# Altium PCB CME_M5_DevBrd_V1.PcbDoc (part 1 of 2)
Units mil, origin at the board's own origin, x right, y up, seen from the top; angles counter-clockwise.
Board outline 3755 x 3680 mil, 2 copper layers (Top Layer, Bottom Layer); 105 components, 0 nets, 635 pads, 230 vias.
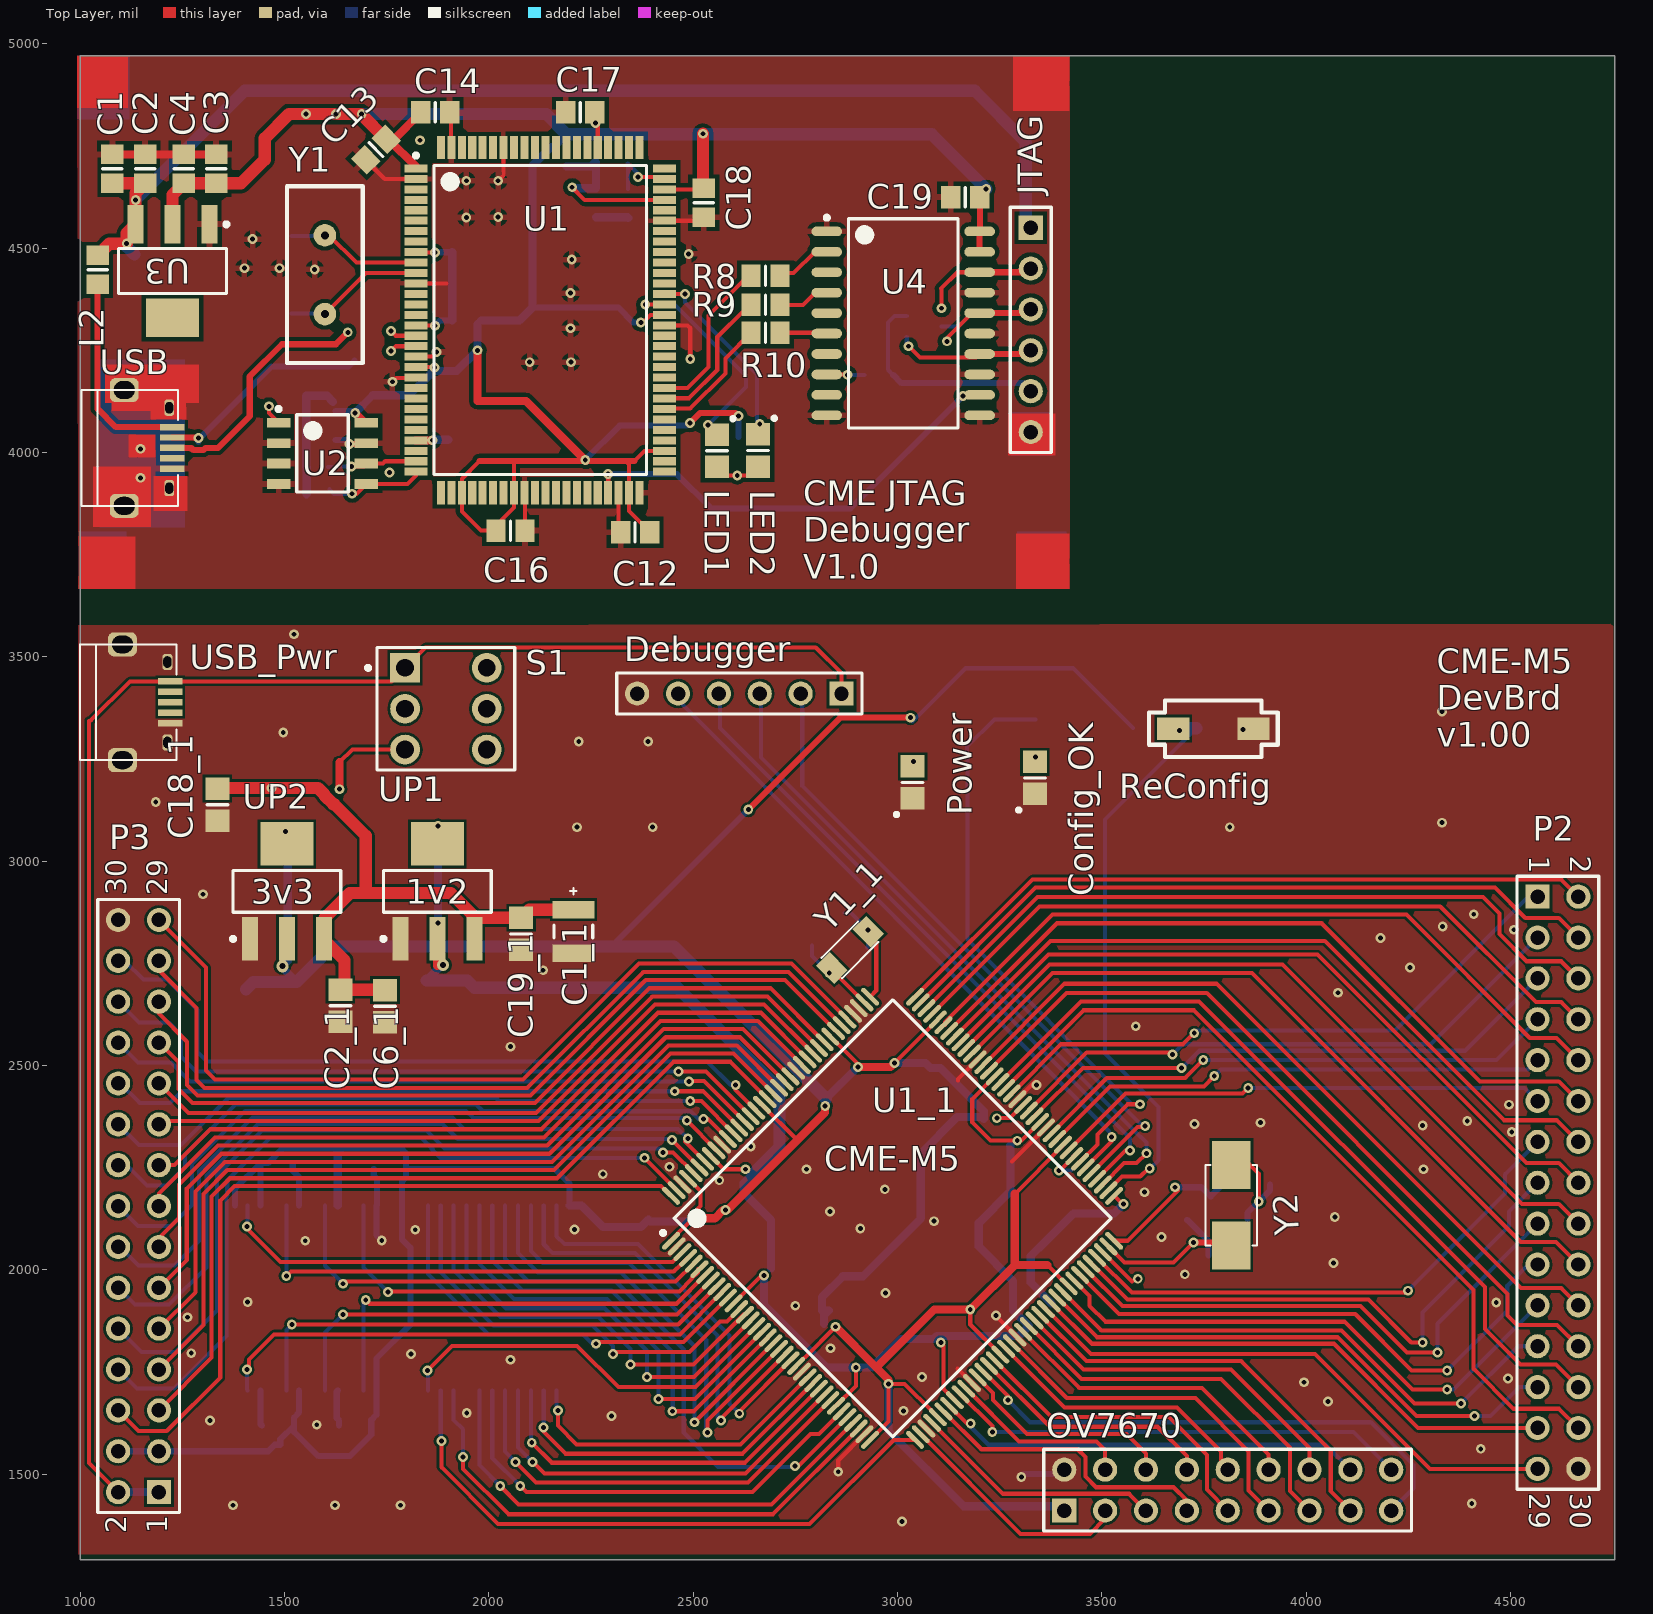
[diagram p0: Top Layer view]
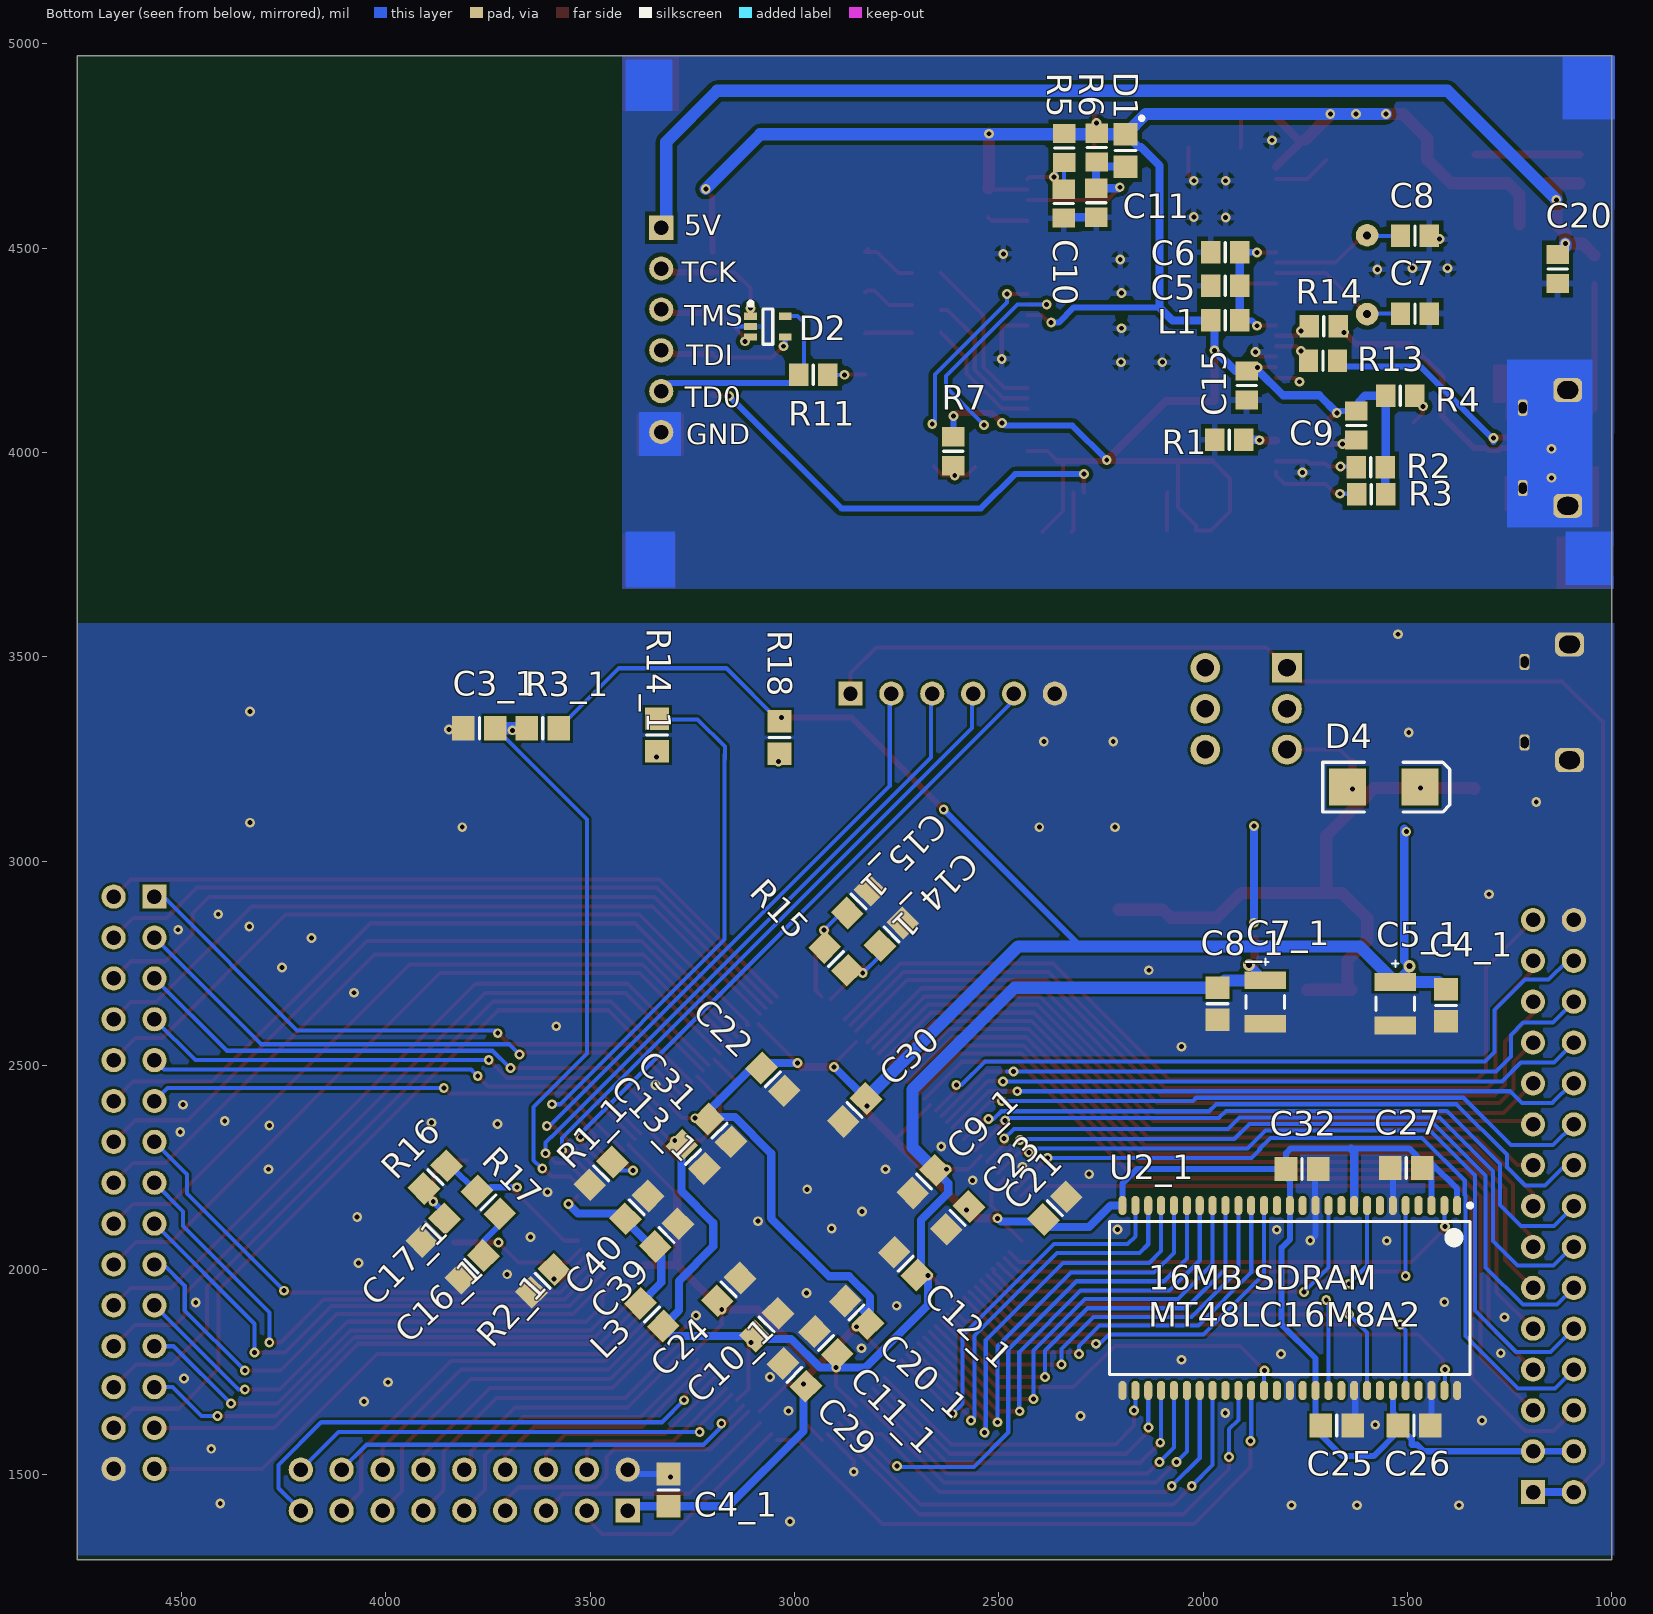
[diagram p1: Bottom Layer view, seen from below]

## Layer stack, top to bottom
Top Solder: solder mask 0.4, Solder Resist, Dk 3.5
Top Layer: signal copper 1.4
Dielectric 1: dielectric 12.6, FR-4, Dk 4.8
Bottom Layer: signal copper 1.4
Bottom Solder: solder mask 0.4, Solder Resist, Dk 3.5

## Board outline
1000,1290 4755,1290 4755,4970 1000,4970

## Design rules (kind name [scope] priority, off if disabled: settings)
Clearance [All] p1: gap=10
PolygonConnect [All] p1: connectstyle=Relief reliefconductorwidth=10 reliefentries=4 polygonreliefangle="90 Angle" airgapwidth=10
RoutingVias [All] p1: holewidth=28 width=50 viastyle="Through Hole" minholewidth=28 minwidth=50 maxholewidth=28 maxwidth=50
SolderMaskExpansion [All] p1: expansion=4
Width [All] p1: maxlimit=10 minlimit=10 preferedwidth=10
30 further rules are at their usual default settings.

## Components (designator, comment, footprint, x,y, rotation, side; value= is the part's Value field where it differs from the comment)
C1 "Cap" 6-0805_N 1079,4693.83 r270 top
C1_1 "Cap Pol3" TanCap-1210 2207,2828 r270 top (schematic designator C1)
C2 "Cap" 6-0805_N 1159,4693.83 r270 top
C2_1 "Cap" 6-0805_M 1637,2646 r90 top (schematic designator C2)
C3 "Cap" 6-0805_N 1333,4693.83 r270 top
C3_1 "Cap" 6-0805_M 3771,3325.26 r180 bottom (schematic designator C3)
C4 "Cap" 6-0805_N 1254,4693.83 r270 top
C4_1 "Cap" 6-0805_M 1406,2647 r90 bottom (schematic designator C4)
C4_1 "Cap" 6-0805_M 3308,1461 r270 bottom (schematic designator C4)
C5 "Cap" 6-0805_N 1946,4407.83 r180 bottom
C5_1 "Cap Pol3" TanCap-1210 1530,2651 r270 bottom (schematic designator C5)
C6 "Cap" 6-0805_N 1946,4489.83 r180 bottom
C6_1 "Cap" 6-0805_M 1746,2645 r90 top (schematic designator C6)
C7 "Cap" 6-0805_N 1482,4339.83 r0 bottom
C7_1 "Cap Pol3" TanCap-1210 1848,2655 r270 bottom (schematic designator C7)
C8 "Cap" 6-0805_N 1482,4529.83 r0 bottom
C8_1 "Cap" 6-0805_M 1965,2651 r90 bottom (schematic designator C8)
C9 "Cap" 6-0805_N 1625,4065.83 r270 bottom
C9_1 "Cap" 6-0805_M 2683,2216 r135 bottom (schematic designator C9)
C10 "Cap" 6-0805_N 2341,4608.83 r90 bottom
C10_1 "Cap" 6-0805_M 3068,1866 r315 bottom (schematic designator C10)
C11 "Cap" 6-0805_N 2262,4610.83 r90 bottom
C11_1 "Cap" 6-0805_M 2923,1821 r225 bottom (schematic designator C11)
C12 "Cap" 6-0805_N 2358,3804.83 r0 top
C12_1 "Cap" 6-0805_M 2728,2015 r225 bottom (schematic designator C12)
C13 "Cap" 6-0805_N 1724,4740.83 r45 top
C13_1 "Cap" 6-0805_M 3248,2276 r45 bottom (schematic designator C13)
C14 "Cap" 6-0805_N 1869,4831.83 r180 top
C14_1 "Cap" 6-0805_M 2763,2821 r315 bottom (schematic designator C14)
C15 "Cap" 6-0805_N 1894,4163.83 r90 bottom
C15_1 "Cap" 6-0805_M 2843,2901 r315 bottom (schematic designator C15)
C16 "Cap" 6-0805_N 2053,3808.83 r180 top
C16_1 "Cap" 6-0805_M 3789,2007 r135 bottom (schematic designator C16)
C17 "Cap" 6-0805_N 2224,4831.83 r0 top
C17_1 "Cap" 6-0805_M 3884,2097 r135 bottom (schematic designator C17)
C18 "Cap" 6-0805_N 2526,4610.83 r90 top
C18_1 "Cap" 6-0805_M 1336,3138 r90 top (schematic designator C18)
C19 "Cap" 6-0805_N 3166,4624.83 r0 top
C19_1 "Cap" 6-0805_M 2079,2822 r90 top (schematic designator C19)
C20 "Cap" 6-0805_N 1133,4448.83 r270 bottom
C20_1 "Cap" 6-0805_M 2848,1896 r225 bottom (schematic designator C20)
C21 "Cap" 6-0805_M 2363,2151.04 r315 bottom
C22 "Cap" 6-0805_M 3053,2466 r45 bottom
C23 "Cap" 6-0805_M 2601,2127 r135 bottom
C24 "Cap" 6-0805_M 3161,1952 r315 bottom
C25 "Cap" 6-0805_M 1673,1619 r0 bottom
C26 "Cap" 6-0805_M 1484,1619 r0 bottom
C27 "Cap" 6-0805_M 1503,2249 r180 bottom
C29 "Cap" 6-0805_M 3000,1743 r225 bottom
C30 "Cap" 6-0805_M 2853,2391 r135 bottom
C31 "Cap" 6-0805_M 3183,2341 r45 bottom
C32 "Cap" 6-0805_M 1758,2247 r0 bottom
C39 "Cap" 6-0805_M 3313,2085 r315 bottom
C40 "Cap" 6-0805_M 3386,2153 r315 bottom
Config_OK "LED2" 6-0805_Diode 3336,3203.63 r270 top
D1 "IN4148" 6-0805_Diode 2190,4738.83 r90 bottom
D2 "PESDXV4UG" SOT5N-65P210X110 3065,4307.83 r180 bottom
D4 "SS34" SMB 1558,3181 r180 bottom
Debugger "Debug" HDR1X6 2863,3410 r180 top (schematic designator P4)
JTAG "Header 6" HDR1X6 3326,4549.83 r270 top
L1 "Inductor" 6-0805_N 1946,4322.83 r180 bottom
L2 "Inductor" 6-0805_N 1043,4446.83 r270 top
L3 "Inductor" 6-0805_M 3349.21,1890.07 r45 bottom
LED1 "LED2" 6-0805_Diode 2558,4003.83 r90 top
LED2 "LED2" 6-0805_Diode 2659,4004.83 r90 top
OV7670 "OV7670" HDR2X9 3408,1411 r0 top
P2 "Header 15X2" HDR2X15 4566,2913 r270 top
P3 "Header 15X2" HDR2X15 1193,1456 r90 top locked
Power "LED2" 6-0805_Diode 3037,3192.63 r270 top
R1 "Res3" 6-0805_N 1936,4030.83 r180 bottom
R1_1 "Res3" 6-0805_M 3473,2236 r135 bottom (schematic designator R1)
R2 "Res3" 6-0805_N 1590,3963.83 r180 bottom
R2_1 "Res3" 6-0805_M 3616,1973 r135 bottom (schematic designator R2)
R3 "Res3" 6-0805_N 1589,3897.83 r180 bottom
R3_1 "Res3" 6-0805_M 3616,3325.26 r180 bottom (schematic designator R3)
R4 "Res3" 6-0805_N 1518,4138.83 r0 bottom
R5 "Res3" 6-0805_N 2340,4744.83 r270 bottom
R6 "Res3" 6-0805_N 2261,4745.83 r270 bottom
R7 "Res3" 6-0805_N 2611,4002.83 r90 bottom
R8 "Res3" 6-0805_N 2677,4431.83 r0 top
R9 "Res3" 6-0805_N 2677,4360.83 r0 top
R10 "Res3" 6-0805_N 2677,4292.83 r0 top
R11 "Res3" 6-0805_N 2954,4189.83 r180 bottom
R13 "Res3" 6-0805_N 1707,4224.83 r180 bottom
R14 "Res3" 6-0805_N 1705,4308.83 r180 bottom
R14_1 "Res1" 6-0805_M 3336,3308.63 r270 bottom (schematic designator R14)
R15 "Res3" 6-0805_M 2898,2761 r225 bottom
R16 "Res3" 6-0805_M 3879,2227 r315 bottom
R17 "Res3" 6-0805_M 3749,2165 r45 bottom
R18 "Res1" 6-0805_M 3037,3302.63 r270 bottom
ReConfig "S2" Switch_SMT-022S-H2.5 3773,3324 r0 top (schematic designator S2)
S1 "SW-DPDT" DPDT-6 1895,3373 r0 top
U1 "CY7C68013A-100AXC" TQFP100N-65P1600X2200X160 2125.87,4323.83 r0 top locked
U1_1 "CME-M5-QFP144" QFP144N-50P2200X2200X160 2988,2126 r45 top locked (schematic designator U1)
U2 "24LC64" SOP8N-127P600X200 1593,3997.83 r0 top
U2_1 "MT48LC16M8A2" TSOP54-80P1180X100- 1788,1931 r270 bottom locked (schematic designator U2)
U3 "LM1117-3.3" SOT223_N 1226,4443.83 r270 top
U4 "74LVC244" SOP20N-127P1030X265 3014,4315.83 r0 top
UP1 "LM1117-1.2" SOT223_M 1874,2926 r90 top
UP2 "LM1117-3.3" SOT223_M 1506,2926 r90 top
USB "Header 9" MicroUSB#1 1129.43,4023.26 r90 top
USB_Pwr "Header 5" MicroUSB#2 1125,3401 r90 top
Y1 "24MHZ" XTAL 1599,4434.83 r270 top
Y1_1 "32.768k" XTAL-3215 2884,2783 r225 top (schematic designator Y1)
Y2 "20M" XTAL-5032 3817,2158 r90 top

## Footprints (in the part's own frame and the unit in brackets; to place one, negate y for a bottom-side part, rotate by r counter-clockwise, add the part's x,y. Pads: shape width x height; smd on the part's side, far side on the other; paste and mask are expansions set on the pad)
6-0805_Diode [mm] "Chip Resistor, Body 2.0x1.2mm, IPC Low Density"
  rect 1.4x1.5 smd: 1(-1,0) 2(1,0)
  silkscreen extent 0,-1.1 2.1,0.65, body extent -1.07,-0.7 1.07,0.7, height 0.7
6-0805_M [mm] "Chip Resistor, Body 2.0x1.2mm, IPC Low Density"
  rect 1.4x1.5 smd: 1(-1,0) 2(1,0)
  silkscreen extent 0,-0.65 0,0.65, body extent -1.07,-0.7 1.07,0.7, height 0.7
6-0805_N [mm] "Chip Resistor, Body 2.0x1.2mm, IPC Medium Density"
  rect 1.2x1.4 smd: 1(-0.9,0) 2(0.9,0)
  silkscreen extent 0,-0.6 0,0.6, body extent -1.07,-0.7 1.07,0.7, height 0.7
DPDT-6 [mm] "Switch; 6 Leads"
  rect 1.85x1.85 hole 1.1: 1(-2.54,2.54)
  round 1.85 hole 1.1: 2(-2.54,0) 3(-2.54,-2.54) 4(2.54,-2.54) 5(2.54,0) 6(2.54,2.54)
  silkscreen extent -4.96,-3.81 4.28,3.81
HDR1X6 [mm] "Connector; Header; 6 Position"
  rect 1.5x1.5 hole 0.9: 1(0,0)
  round 1.5 hole 0.9: 2(2.54,0) 3(5.08,0) 4(7.62,0) 5(10.16,0) 6(12.7,0)
  silkscreen extent -1.27,-1.27 13.97,1.27
HDR2X9 [mm] "Connector; Header; 9x2 Position"
  rect 1.5x1.5 hole 0.9: 1(0,0)
  round 1.5 hole 0.9: 2(0,2.54) 3(2.54,0) 4(2.54,2.54) 5(5.08,0) 6(5.08,2.54) 7(7.62,0) 8(7.62,2.54) 9(10.16,0) 10(10.16,2.54) 11(12.7,0) 12(12.7,2.54) 13(15.24,0) 14(15.24,2.54) 15(17.78,0) 16(17.78,2.54) 17(20.32,0) 18(20.32,2.54)
  silkscreen extent -1.27,-1.27 21.59,3.81
HDR2X15 [mm] "Connector; Header; 15x2 Position"
  rect 1.5x1.5 hole 0.9: 1(0,0)
  round 1.5 hole 0.9: 2(0,2.54) 3(2.54,0) 4(2.54,2.54) 5(5.08,0) 6(5.08,2.54) 7(7.62,0) 8(7.62,2.54) 9(10.16,0) 10(10.16,2.54) 11(12.7,0) 12(12.7,2.54) 13(15.24,0) 14(15.24,2.54) 15(17.78,0) 16(17.78,2.54) 17(20.32,0) 18(20.32,2.54) 19(22.86,0) 20(22.86,2.54) 21(25.4,0) 22(25.4,2.54) 23(27.94,0) 24(27.94,2.54) 25(30.48,0) 26(30.48,2.54) 27(33.02,0) 28(33.02,2.54) 29(35.56,0) 30(35.56,2.54)
  silkscreen extent -1.27,-1.27 36.83,3.81
MicroUSB#1 [mm]
  round 0.635 on Top Overlay: 0(0.986,-3.776)
  rect 0.4x1.524 smd: 1(0.986,-2.426) 2(0.336,-2.426) 3(-0.314,-2.426) 4(-0.964,-2.426) 5(-1.614,-2.426)
  rrect50% 1.5x1.8 hole 1.1 slot 1.3 at 90 deg: 6(3.286,0.543) 7(-3.911,0.543)
  rrect50% 1x0.6 hole 0.5 slot 0.7 at 0 deg: 8(-2.812,-2.254) 9(2.188,-2.254)
  silkscreen extent -3.91,-2.81 3.29,3.19
MicroUSB#2 [mm]
  round 0.635 on Top Overlay: 0(0.986,-3.776)
  rect 0.4x1.524 smd: 1(0.986,-2.426) 2(0.336,-2.426) 3(-0.314,-2.426) 4(-0.964,-2.426) 5(-1.614,-2.426)
  rrect50% 1.5x1.8 hole 1.1 slot 1.3 at 90 deg: 5(-3.911,0.543) 5(3.286,0.543)
  rrect50% 1x0.6 hole 0.5 slot 0.7 at 0 deg: 5(-2.812,-2.254) 5(2.188,-2.254)
  silkscreen extent -3.91,-2.81 3.29,3.19
QFP144N-50P2200X2200X160 [mm] "TSQFP, 144-Leads, Body 20.00x20.00mm, Pitch 0.50mm, IPC Medium Density"
  oval 1.45x0.3 smd: 1(-10.725,8.75) 2(-10.725,8.25) 3(-10.725,7.75) 4(-10.725,7.25) 5(-10.725,6.75) 6(-10.725,6.25) 7(-10.725,5.75) 8(-10.725,5.25) 9(-10.725,4.75) 10(-10.725,4.25) 11(-10.725,3.75) 12(-10.725,3.25) 13(-10.725,2.75) 14(-10.725,2.25) 15(-10.725,1.75) 16(-10.725,1.25) 17(-10.725,0.75) 18(-10.725,0.25) 19(-10.725,-0.25) 20(-10.725,-0.75) 21(-10.725,-1.25) 22(-10.725,-1.75) 23(-10.725,-2.25) 24(-10.725,-2.75) 25(-10.725,-3.25) 26(-10.725,-3.75) 27(-10.725,-4.25) 28(-10.725,-4.75) 29(-10.725,-5.25) 30(-10.725,-5.75) 31(-10.725,-6.25) 32(-10.725,-6.75) 33(-10.725,-7.25) 34(-10.725,-7.75) 35(-10.725,-8.25) 36(-10.725,-8.75) 73(10.725,-8.75) 74(10.725,-8.25) 75(10.725,-7.75) 76(10.725,-7.25) 77(10.725,-6.75) 78(10.725,-6.25) 79(10.725,-5.75) 80(10.725,-5.25) 81(10.725,-4.75) 82(10.725,-4.25) 83(10.725,-3.75) 84(10.725,-3.25) 85(10.725,-2.75) 86(10.725,-2.25) 87(10.725,-1.75) 88(10.725,-1.25) 89(10.725,-0.75) 90(10.725,-0.25) 91(10.725,0.25) 92(10.725,0.75) 93(10.725,1.25) 94(10.725,1.75) 95(10.725,2.25) 96(10.725,2.75) 97(10.725,3.25) 98(10.725,3.75) 99(10.725,4.25) 100(10.725,4.75) 101(10.725,5.25) 102(10.725,5.75) 103(10.725,6.25) 104(10.725,6.75) 105(10.725,7.25) 106(10.725,7.75) 107(10.725,8.25) 108(10.725,8.75)
  oval 0.3x1.45 smd: 37(-8.75,-10.725) 38(-8.25,-10.725) 39(-7.75,-10.725) 40(-7.25,-10.725) 41(-6.75,-10.725) 42(-6.25,-10.725) 43(-5.75,-10.725) 44(-5.25,-10.725) 45(-4.75,-10.725) 46(-4.25,-10.725) 47(-3.75,-10.725) 48(-3.25,-10.725) 49(-2.75,-10.725) 50(-2.25,-10.725) 51(-1.75,-10.725) 52(-1.25,-10.725) 53(-0.75,-10.725) 54(-0.25,-10.725) 55(0.25,-10.725) 56(0.75,-10.725) 57(1.25,-10.725) 58(1.75,-10.725) 59(2.25,-10.725) 60(2.75,-10.725) 61(3.25,-10.725) 62(3.75,-10.725) 63(4.25,-10.725) 64(4.75,-10.725) 65(5.25,-10.725) 66(5.75,-10.725) 67(6.25,-10.725) 68(6.75,-10.725) 69(7.25,-10.725) 70(7.75,-10.725) 71(8.25,-10.725) 72(8.75,-10.725) 109(8.75,10.725) 110(8.25,10.725) 111(7.75,10.725) 112(7.25,10.725) 113(6.75,10.725) 114(6.25,10.725) 115(5.75,10.725) 116(5.25,10.725) 117(4.75,10.725) 118(4.25,10.725) 119(3.75,10.725) 120(3.25,10.725) 121(2.75,10.725) 122(2.25,10.725) 123(1.75,10.725) 124(1.25,10.725) 125(0.75,10.725) 126(0.25,10.725) 127(-0.25,10.725) 128(-0.75,10.725) 129(-1.25,10.725) 130(-1.75,10.725) 131(-2.25,10.725) 132(-2.75,10.725) 133(-3.25,10.725) 134(-3.75,10.725) 135(-4.25,10.725) 136(-4.75,10.725) 137(-5.25,10.725) 138(-5.75,10.725) 139(-6.25,10.725) 140(-6.75,10.725) 141(-7.25,10.725) 142(-7.75,10.725) 143(-8.25,10.725) 144(-8.75,10.725)
  silkscreen extent -10.85,-9.6 9.6,9.6, body extent -10,-10 10,10, height 1.6
SMB [mm] "DO-214-AA/SMB; 2 C-Bend Leads; Body 5.3 x 3.6 mm, inc. leads (LxW)"
  rect 2.3x2.3 smd: 1(-2.25,0) 2(2.25,0)
  silkscreen extent -3.8,-1.55 4.1,1.55
SOP8N-127P600X200 [mm] "SOP, 8-Leads, Body 4.90x3.90mm, Pitch 1.27mm, IPC Medium Density"
  rect 1.45x0.6 smd: 1(-2.725,1.905) 2(-2.725,0.635) 3(-2.725,-0.635) 4(-2.725,-1.905) 5(2.725,-1.905) 6(2.725,-0.635) 7(2.725,0.635) 8(2.725,1.905)
  silkscreen extent -2.85,-2.4 1.6,2.88, body extent -2,-2.4 2,2.4, height 2
SOP20N-127P1030X265 [mm] "SOP, 20-Leads, Body 12.80x7.50mm, Pitch 1.27mm, IPC Medium Density"
  oval 1.9x0.6 smd: 1(-4.75,5.715) 2(-4.75,4.445) 3(-4.75,3.175) 4(-4.75,1.905) 5(-4.75,0.635) 6(-4.75,-0.635) 7(-4.75,-1.905) 8(-4.75,-3.175) 9(-4.75,-4.445) 10(-4.75,-5.715) 11(4.75,-5.715) 12(4.75,-4.445) 13(4.75,-3.175) 14(4.75,-1.905) 15(4.75,-0.635) 16(4.75,0.635) 17(4.75,1.905) 18(4.75,3.175) 19(4.75,4.445) 20(4.75,5.715)
  silkscreen extent -4.87,-6.5 3.4,6.69, body extent -3.8,-6.5 3.8,6.5, height 2.65
SOT5N-65P210X110 [mm] "SOT353, 5-Leads, Body 2.00x2.10mm, Pitch 0.65mm, IPC Medium Density"
  rect 0.8x0.45 smd: 1(-1.075,0.65) 2(-1.075,0) 3(-1.075,-0.65) 4(1.075,-0.65) 5(1.075,0.65)
  silkscreen extent -1.2,-1.1 0.3,1.55, body extent -0.67,-1.1 0.67,1.1, height 1.1
SOT223_M [mm] "SOT223, 4-Leads, Body 6.5x3.5mm, Pitch 2.3mm, Lead Span 7mm, IPC Low Density"
  rect 2.7x1 smd: 1(-2.95,2.3) 2(-2.95,0) 3(-2.95,-2.3)
  rect 2.7x3.3 smd: 4(2.95,0)
  silkscreen extent -3.07,-3.35 1.3,3.47, body extent -1.85,-3.35 1.85,3.35, height 1.7
SOT223_N [mm] "SOT223, 4-Leads, Body 6.5x3.5mm, Pitch 2.3mm, Lead Span 7mm, IPC Medium Density"
  rect 2.4x1 smd: 1(-2.9,2.3) 2(-2.9,0) 3(-2.9,-2.3)
  rect 2.4x3.3 smd: 4(2.9,0)
  silkscreen extent -3.02,-3.35 1.4,3.48, body extent -1.85,-3.35 1.85,3.35, height 1.7
Switch_SMT-022S-H2.5 [mm]
  rect 2x1.4 smd: 1(2.5,0) 2(-2.5,0)
  silkscreen extent -4,-1.75 4,1.75
TanCap-1210 [mm] "Chip Capacitor, Body 3.2x2.5mm, IPC High Density"
  rect 1.1x2.6 smd: 1(-1.35,0) 2(1.35,0)
  silkscreen extent -2.7,-1.2 0.4,1.2, body extent -1.68,-1.32 1.68,1.32, height 0.9
TQFP100N-65P1600X2200X160 [mm] "TQFP, 100-Leads, Body 14.00x20.00mm, Pitch 0.65mm, IPC Medium Density"
  rect 1.45x0.5 smd: 1(-7.725,9.425) 2(-7.725,8.775) 3(-7.725,8.125) 4(-7.725,7.475) 5(-7.725,6.825) 6(-7.725,6.175) 7(-7.725,5.525) 8(-7.725,4.875) 9(-7.725,4.225) 10(-7.725,3.575) 11(-7.725,2.925) 12(-7.725,2.275) 13(-7.725,1.625) 14(-7.725,0.975) 15(-7.725,0.325) 16(-7.725,-0.325) 17(-7.725,-0.975) 18(-7.725,-1.625) 19(-7.725,-2.275) 20(-7.725,-2.925) 21(-7.725,-3.575) 22(-7.725,-4.225) 23(-7.725,-4.875) 24(-7.725,-5.525) 25(-7.725,-6.175) 26(-7.725,-6.825) 27(-7.725,-7.475) 28(-7.725,-8.125) 29(-7.725,-8.775) 30(-7.725,-9.425) 51(7.725,-9.425) 52(7.725,-8.775) 53(7.725,-8.125) 54(7.725,-7.475) 55(7.725,-6.825) 56(7.725,-6.175) 57(7.725,-5.525) 58(7.725,-4.875) 59(7.725,-4.225) 60(7.725,-3.575) 61(7.725,-2.925) 62(7.725,-2.275) 63(7.725,-1.625) 64(7.725,-0.975) 65(7.725,-0.325) 66(7.725,0.325) 67(7.725,0.975) 68(7.725,1.625) 69(7.725,2.275) 70(7.725,2.925) 71(7.725,3.575) 72(7.725,4.225) 73(7.725,4.875) 74(7.725,5.525) 75(7.725,6.175) 76(7.725,6.825) 77(7.725,7.475) 78(7.725,8.125) 79(7.725,8.775) 80(7.725,9.425)
  rect 0.5x1.45 smd: 31(-6.175,-10.725) 32(-5.525,-10.725) 33(-4.875,-10.725) 34(-4.225,-10.725) 35(-3.575,-10.725) 36(-2.925,-10.725) 37(-2.275,-10.725) 38(-1.625,-10.725) 39(-0.975,-10.725) 40(-0.325,-10.725) 41(0.325,-10.725) 42(0.975,-10.725) 43(1.625,-10.725) 44(2.275,-10.725) 45(2.925,-10.725) 46(3.575,-10.725) 47(4.225,-10.725) 48(4.875,-10.725) 49(5.525,-10.725) 50(6.175,-10.725) 81(6.175,10.725) 82(5.525,10.725) 83(4.875,10.725) 84(4.225,10.725) 85(3.575,10.725) 86(2.925,10.725) 87(2.275,10.725) 88(1.625,10.725) 89(0.975,10.725) 90(0.325,10.725) 91(-0.325,10.725) 92(-0.975,10.725) 93(-1.625,10.725) 94(-2.275,10.725) 95(-2.925,10.725) 96(-3.575,10.725) 97(-4.225,10.725) 98(-4.875,10.725) 99(-5.525,10.725) 100(-6.175,10.725)
  silkscreen extent -7.85,-9.6 6.6,10.35, body extent -7,-10 7,10, height 1.6
TSOP54-80P1180X100- [mm] "TSOP, 54-Leads, Body 22.22x10.16mm, Pitch 0.80mm, IPC Medium Density"
  oval 1.2x0.5 smd: 1(-5.75,10.4) 2(-5.75,9.6) 3(-5.75,8.8) 4(-5.75,8) 5(-5.75,7.2) 6(-5.75,6.4) 7(-5.75,5.6) 8(-5.75,4.8) 9(-5.75,4) 10(-5.75,3.2) 11(-5.75,2.4) 12(-5.75,1.6) 13(-5.75,0.8) 14(-5.75,0) 15(-5.75,-0.8) 16(-5.75,-1.6) 17(-5.75,-2.4) 18(-5.75,-3.2) 19(-5.75,-4) 20(-5.75,-4.8) 21(-5.75,-5.6) 22(-5.75,-6.4) 23(-5.75,-7.2) 24(-5.75,-8) 25(-5.75,-8.8) 26(-5.75,-9.6) 27(-5.75,-10.4) 28(5.75,-10.4) 29(5.75,-9.6) 30(5.75,-8.8) 31(5.75,-8) 32(5.75,-7.2) 33(5.75,-6.4) 34(5.75,-5.6) 35(5.75,-4.8) 36(5.75,-4) 37(5.75,-3.2) 38(5.75,-2.4) 39(5.75,-1.6) 40(5.75,-0.8) 41(5.75,0) 42(5.75,0.8) 43(5.75,1.6) 44(5.75,2.4) 45(5.75,3.2) 46(5.75,4) 47(5.75,4.8) 48(5.75,5.6) 49(5.75,6.4) 50(5.75,7.2) 51(5.75,8) 52(5.75,8.8) 53(5.75,9.6) 54(5.75,10.4)
  silkscreen extent -5.87,-11.2 4.75,11.32, body extent -5.15,-11.2 5.15,11.2, height 1
XTAL [mm]
  round 1.4 hole 0.5: 1(-2.45,0) 2(2.45,0)
  silkscreen extent -5.5,-2.35 5.5,2.35
XTAL-3215 [mm]
  rect 1.2x1.6 smd: 1(-1.6,0) 2(1.6,0)
  silkscreen extent -1.6,-0.9 1.6,0.9
XTAL-5032 [mm]
  rect 3x2.4 smd: 1(-2.5,0) 2(2.5,0)
  silkscreen extent -2.5,-1.6 2.5,1.6

## Part data
C1 C2 C2_1 C3 C3_1 C4 C4_1 C4_1 C5 C6 C6_1 C7 C8 C8_1 C9 C9_1 C10 C10_1 C11 C11_1 C12 C12_1 C13 C13_1 C14 C14_1 C15 C15_1 C16 C16_1 C17 C17_1 C18 C18_1 C19 C19_1 C20 C20_1 C21 C22 C23 C24 C25 C26 C27 C29 C30 C31 C32 C39 C40: "Capacitor"
C1_1 C5_1 C7_1: "Polarized Capacitor (Surface Mount)"
Config_OK LED1 LED2 Power: "Typical RED, GREEN, YELLOW, AMBER GaAs LED"
D1: library part Diode, "Default Diode"
D2: library part "ESD_Diode x4"
D4: library part "D Schottky", "Schottky Diode"
Debugger: library part "Header 6", "Header, 6-Pin"
JTAG: "Header, 6-Pin"
OV7670: library part "Header 9X2", "Header, 9-Pin, Dual row"
P2 P3: "Header, 15-Pin, Dual row"
R1 R1_1 R2 R2_1 R3 R3_1 R4 R5 R6 R7 R8 R9 R10 R11 R13 R14 R14_1 R15 R16 R17 R18: "Resistor"
ReConfig: library part SW-PB, "Switch"
S1: "Double-Pole, Double-Throw Switch"
U2: library part 24XXxx
U2_1: library part SDRAM-8
U3 UP1 UP2: library part LM1117
U4: library part 74xx244
USB: "Header, 9-Pin"
USB_Pwr: "Header, 5-Pin"
Y1 Y1_1 Y2: library part XTAL, "Crystal Oscillator"

## Via types
v1: diameter 24, hole 12, Top Layer to Bottom Layer, 228 vias
v2: diameter 30, hole 15, Top Layer to Bottom Layer, 2 vias

## Nets (pads, with @x,y where several pads share a name; then routed paths per layer and width w, separated by ;. In a path a pad name is that pad's centre, name@x,y a point inside that pad or via, vN(x,y) a via of type N, cw(c..) or ccw(c..) an arc to the next point about the centre after c; other vN are vias at no path point)
pads on no net: C1.1 C1.2 C1_1.1 C1_1.2 C2.1 C2.2 C2_1.1 C2_1.2 C3.1 C3.2 C3_1.1 C3_1.2 C4.1 C4.2 C4_1.1 C4_1.2 C5.1 C5.2 C5_1.1 C5_1.2 C6.1 C6.2 C6_1.1 C6_1.2 C7.1 C7.2 C7_1.1 C7_1.2 C8.1 C8.2 C8_1.1 C8_1.2 C9.1 C9.2 C9_1.1 C9_1.2 C10.1 C10.2 C10_1.1 C10_1.2 C11.1 C11.2 C11_1.1 C11_1.2 C12.1 C12.2 C12_1.1 C12_1.2 C13.1 C13.2 C13_1.1 C13_1.2 C14.1 C14.2 C14_1.1 C14_1.2 C15.1 C15.2 C15_1.1 C15_1.2 C16.1 C16.2 C16_1.1 C16_1.2 C17.1 C17.2 C17_1.1 C17_1.2 C18.1 C18.2 C18_1.1 C18_1.2 C19.1 C19.2 C19_1.1 C19_1.2 C20.1 C20.2 C20_1.1 C20_1.2 C21.1 C21.2 C22.1 C22.2 C23.1 C23.2 C24.1 C24.2 C25.1 C25.2 C26.1 C26.2 C27.1 C27.2 C29.1 C29.2 C30.1 C30.2 C31.1 C31.2 C32.1 C32.2 C39.1 C39.2 C40.1 C40.2 Config_OK.1 Config_OK.2 D1.1 D1.2 D2.1 D2.2 D2.3 D2.4 D2.5 D4.1 D4.2 Debugger.1 Debugger.2 Debugger.3 Debugger.4 Debugger.5 Debugger.6 JTAG.1 JTAG.2 JTAG.3 JTAG.4 JTAG.5 JTAG.6 L1.1 L1.2 L2.1 L2.2 L3.1 L3.2 LED1.1 LED1.2 LED2.1 LED2.2 OV7670.1 OV7670.2 OV7670.3 OV7670.4 OV7670.5 OV7670.6 OV7670.7 OV7670.8 OV7670.9 OV7670.10 OV7670.11 OV7670.12 OV7670.13 OV7670.14 OV7670.15 OV7670.16 OV7670.17 OV7670.18 P2.1 P2.2 P2.3 P2.4 P2.5 P2.6 P2.7 P2.8 P2.9 P2.10 P2.11 P2.12 P2.13 P2.14 P2.15 P2.16 P2.17 P2.18 P2.19 P2.20 P2.21 P2.22 P2.23 P2.24 P2.25 P2.26 P2.27 P2.28 P2.29 P2.30 P3.1 P3.2 P3.3 P3.4 P3.5 P3.6 P3.7 P3.8 P3.9 P3.10 P3.11 P3.12 P3.13 P3.14 P3.15 P3.16 P3.17 P3.18 P3.19 P3.20 P3.21 P3.22 P3.23 P3.24 P3.25 P3.26 P3.27 P3.28 P3.29 P3.30 Power.1 Power.2 R1.1 R1.2 R1_1.1 R1_1.2 R2.1 R2.2 R2_1.1 R2_1.2 R3.1 R3.2 R3_1.1 R3_1.2 R4.1 R4.2 R5.1 R5.2 R6.1 R6.2 R7.1 R7.2 R8.1 R8.2 R9.1 R9.2 R10.1 R10.2 R11.1 R11.2 R13.1 R13.2 R14.1 R14.2 R14_1.1 R14_1.2 R15.1 R15.2 R16.1 R16.2 R17.1 R17.2 R18.1 R18.2 ReConfig.1 ReConfig.2 S1.1 S1.2 S1.3 S1.4 S1.5 S1.6 U1.1 U1.2 U1.3 U1.4 U1.5 U1.6 U1.7 U1.8 U1.9 U1.10 U1.11 U1.12 U1.13 U1.14 U1.15 U1.16 U1.17 U1.18 U1.19 U1.20 U1.21 U1.22 U1.23 U1.24 U1.25 U1.26 U1.27 U1.28 U1.29 U1.30 U1.31 U1.32 U1.33 U1.34 U1.35 U1.36 U1.37 U1.38 U1.39 U1.40 U1.41 U1.42 U1.43 U1.44 U1.45 U1.46 U1.47 U1.48 U1.49 U1.50 U1.51 U1.52 U1.53 U1.54 U1.55 U1.56 U1.57 U1.58 U1.59 U1.60 U1.61 U1.62 U1.63 U1.64 U1.65 U1.66 U1.67 U1.68 U1.69 U1.70 U1.71 U1.72 U1.73 U1.74 U1.75 U1.76 U1.77 U1.78 U1.79 U1.80 U1.81 U1.82 U1.83 U1.84 U1.85 U1.86 U1.87 U1.88 U1.89 U1.90 U1.91 U1.92 U1.93 U1.94 U1.95 U1.96 U1.97 U1.98 U1.99 U1.100 U1_1.1 U1_1.2 U1_1.3 U1_1.4 U1_1.5 U1_1.6 U1_1.7 U1_1.8 U1_1.9 U1_1.10 U1_1.11 U1_1.12 U1_1.13 U1_1.14 U1_1.15 U1_1.16 U1_1.17 U1_1.18 U1_1.19 U1_1.20 U1_1.21 U1_1.22 U1_1.23 U1_1.24 U1_1.25 U1_1.26 U1_1.27 U1_1.28 U1_1.29 U1_1.30 U1_1.31 U1_1.32 U1_1.33 U1_1.34 U1_1.35 U1_1.36 U1_1.37 U1_1.38 U1_1.39 U1_1.40 U1_1.41 U1_1.42 U1_1.43 U1_1.44 U1_1.45 U1_1.46 U1_1.47 U1_1.48 U1_1.49 U1_1.50 U1_1.51 U1_1.52 U1_1.53 U1_1.54 U1_1.55 U1_1.56 U1_1.57 U1_1.58 U1_1.59 U1_1.60 U1_1.61 U1_1.62 U1_1.63 U1_1.64 U1_1.65 U1_1.66 U1_1.67 U1_1.68 U1_1.69 U1_1.70 U1_1.71 U1_1.72 U1_1.73 U1_1.74 U1_1.75 U1_1.76 U1_1.77 U1_1.78 U1_1.79 U1_1.80 U1_1.81 U1_1.82 U1_1.83 U1_1.84 U1_1.85 U1_1.86 U1_1.87 U1_1.88 U1_1.89 U1_1.90 U1_1.91 U1_1.92 U1_1.93 U1_1.94 U1_1.95 U1_1.96 U1_1.97 U1_1.98 U1_1.99 U1_1.100 U1_1.101 U1_1.102 U1_1.103 U1_1.104 U1_1.105 U1_1.106 U1_1.107 U1_1.108 U1_1.109 U1_1.110 U1_1.111 U1_1.112 U1_1.113 U1_1.114 U1_1.115 U1_1.116 U1_1.117 U1_1.118 U1_1.119 U1_1.120 U1_1.121 U1_1.122 U1_1.123 U1_1.124 U1_1.125 U1_1.126 U1_1.127 U1_1.128 U1_1.129 U1_1.130 U1_1.131 U1_1.132 U1_1.133 U1_1.134 U1_1.135 U1_1.136 U1_1.137 U1_1.138 U1_1.139 U1_1.140 U1_1.141 U1_1.142 U1_1.143 U1_1.144 U2.1 U2.2 U2.3 U2.4 U2.5 U2.6 U2.7 U2.8 U2_1.1 U2_1.2 U2_1.3 U2_1.4 U2_1.5 U2_1.6 U2_1.7 U2_1.8 U2_1.9 U2_1.10 U2_1.11 U2_1.12 U2_1.13 U2_1.14 U2_1.15 U2_1.16 U2_1.17 U2_1.18 U2_1.19 U2_1.20 U2_1.21 U2_1.22 U2_1.23 U2_1.24 U2_1.25 U2_1.26 U2_1.27 U2_1.28 U2_1.29 U2_1.30 U2_1.31 U2_1.32 U2_1.33 U2_1.34 U2_1.35 U2_1.36 U2_1.37 U2_1.38 U2_1.39 U2_1.40 U2_1.41 U2_1.42 U2_1.43 U2_1.44 U2_1.45 U2_1.46 U2_1.47 U2_1.48 U2_1.49 U2_1.50 U2_1.51 U2_1.52 U2_1.53 U2_1.54 U3.1 U3.2 U3.3 U3.4 U4.1 U4.2 U4.3 U4.4 U4.5 U4.6 U4.7 U4.8 U4.9 U4.10 U4.11 U4.12 U4.13 U4.14 U4.15 U4.16 U4.17 U4.18 U4.19 U4.20 UP1.1 UP1.2 UP1.3 UP1.4 UP2.1 UP2.2 UP2.3 UP2.4 USB.0 USB.1 USB.2 USB.3 USB.4 USB.5 USB.6 USB.7 USB.8 USB.9 USB_Pwr.0 USB_Pwr.1 USB_Pwr.2 USB_Pwr.3 USB_Pwr.4 USB_Pwr.5 Y1.1 Y1.2 Y1_1.1 Y1_1.2 Y2.1 Y2.2